# Altium PCB Copy of main - shifted.PcbDoc (part 11 of 15)
Units mil, origin at the board's own origin, x right, y up, seen from the top; angles counter-clockwise.
Board outline 8394.55 x 5164.44 mil, 7 copper layers (Top Layer 1, Layer 2, Layer 3, Unused, Layer 4_pow, Layer 5_gnd, Bottom 6+gnd), stack 46.112 mil thick; 363 components, 409 nets, 1750 pads, 991 vias.
Unrouted connection lines stored in the file: 111.
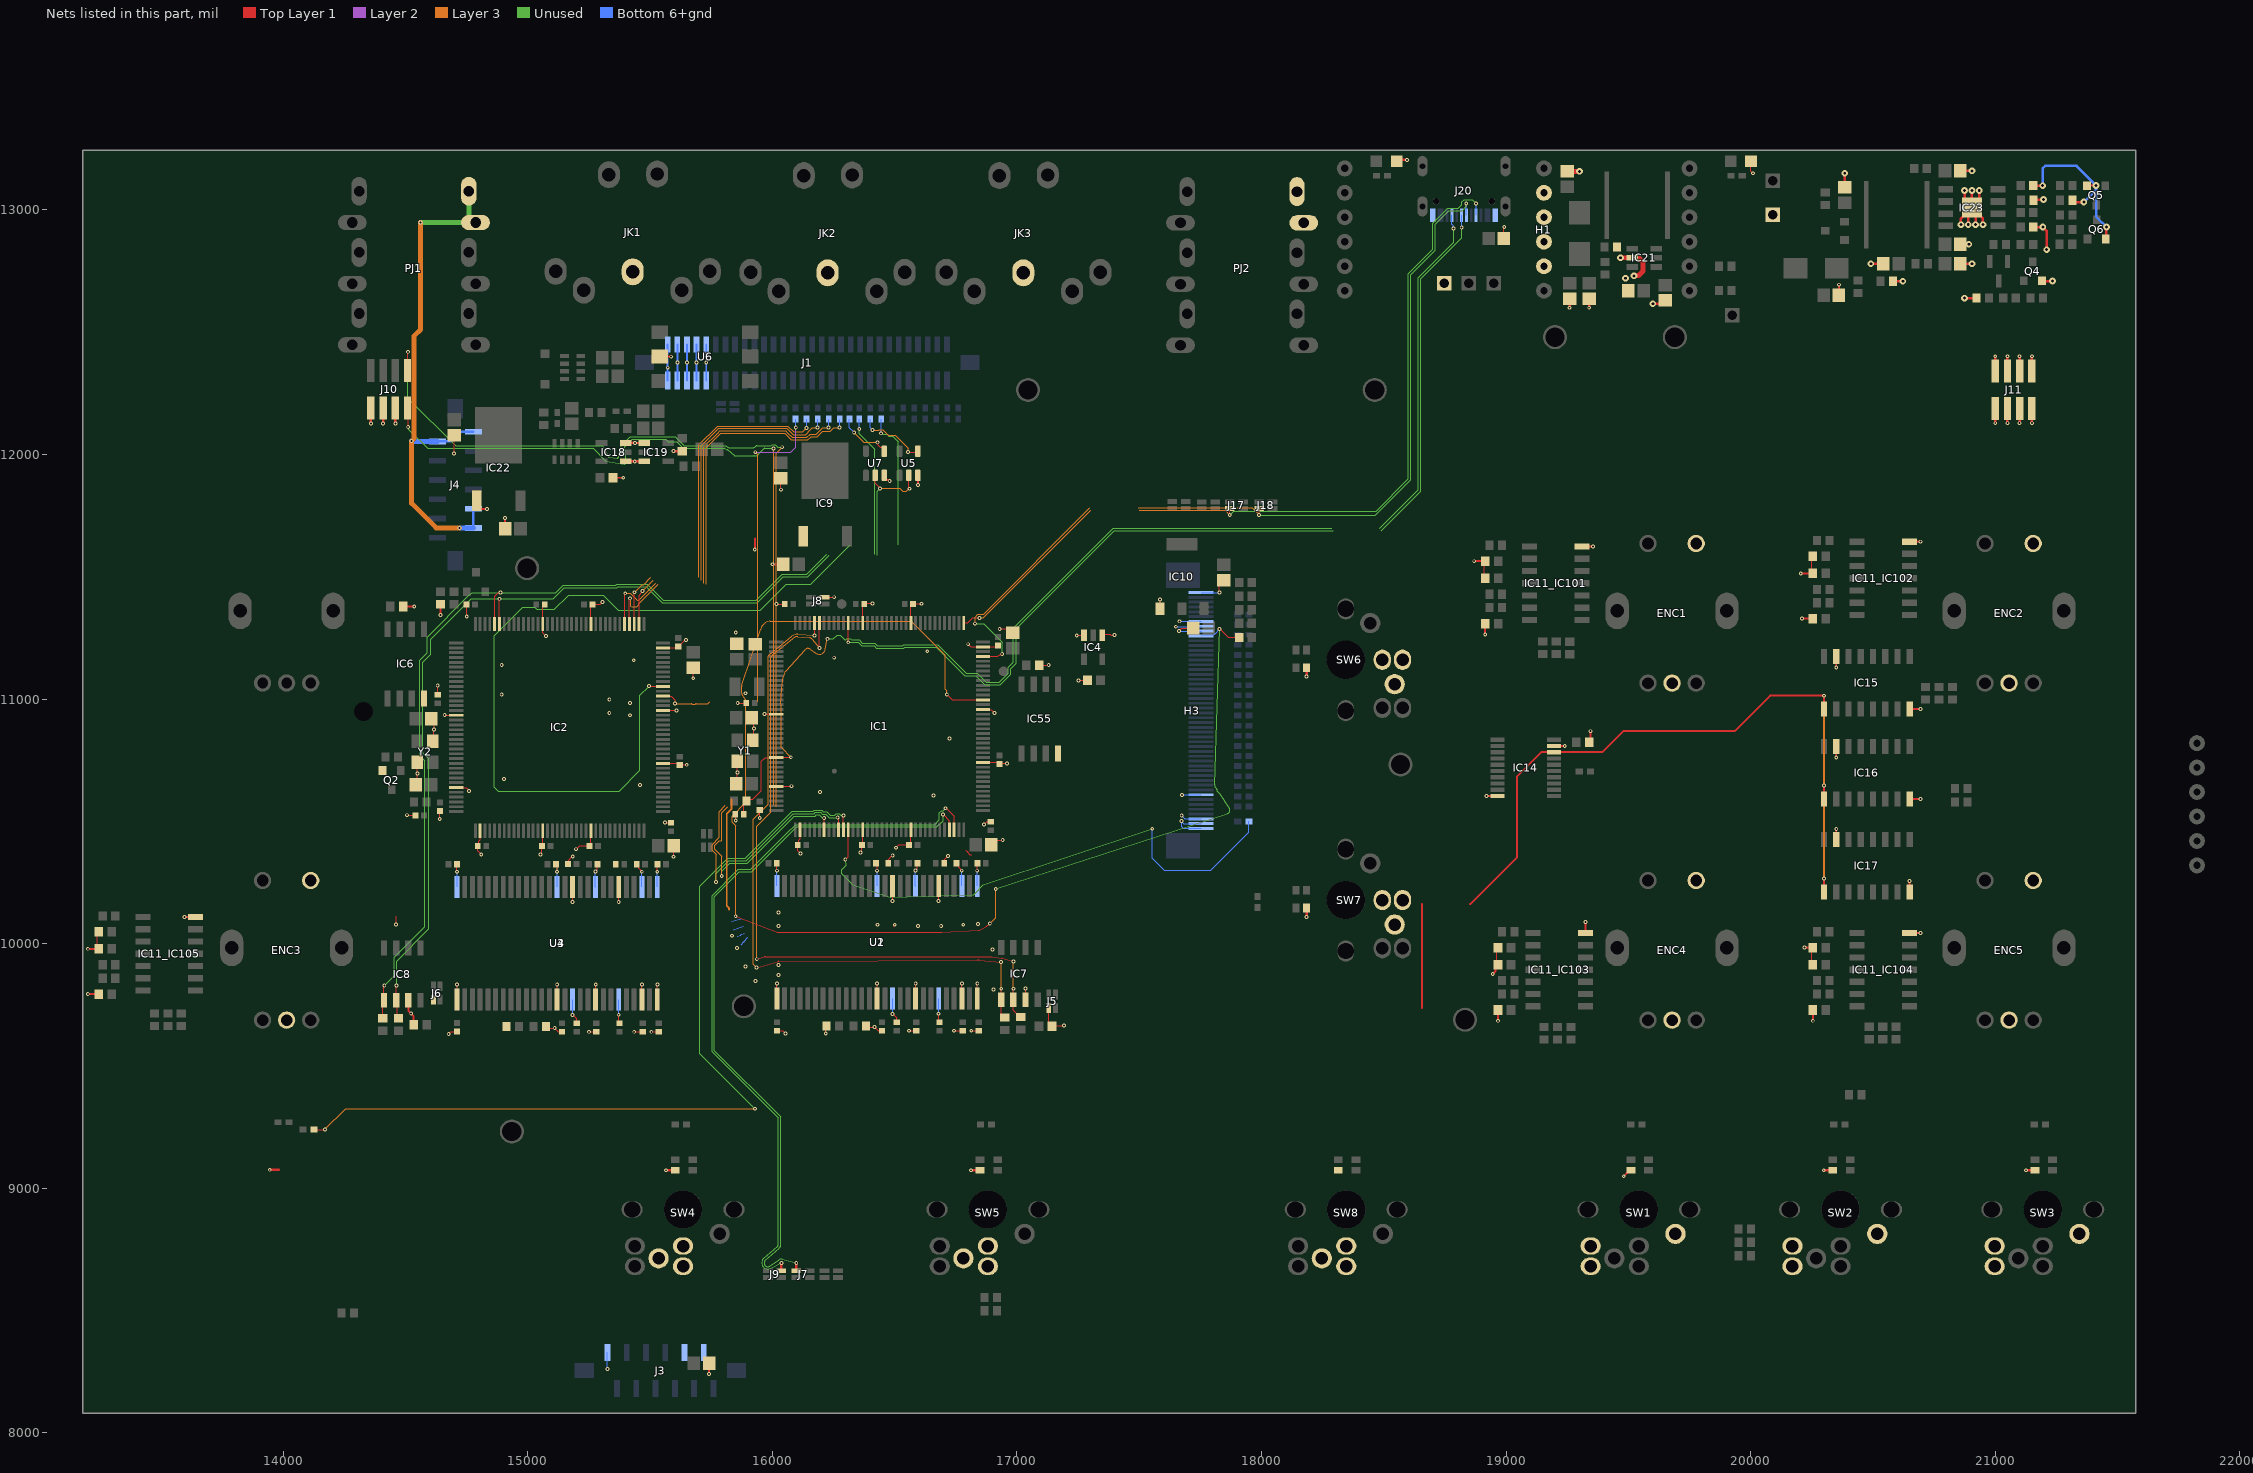
[diagram p14: the nets of this part, all layers, seen from the top]

## Via types
v1: diameter 15.75, hole 7.87, Top Layer 1 to Bottom 6+gnd, tented both sides, 923 vias
v2: diameter 27.56, hole 11.81, Top Layer 1 to Bottom 6+gnd, 45 vias
v3: diameter 23.62/23.62/23.62/23.62/23.62/23.62/23.62 (per signal layer), hole 12, Top Layer 1 to Bottom 6+gnd, tented top, 10 vias
v4: diameter 15.75, hole 7.87, Top Layer 1 to Bottom 6+gnd, 10 vias
v5: diameter 23.62/23.62/23.62/23.62/23.62/23.62/23.62 (per signal layer), hole 12, Top Layer 1 to Bottom 6+gnd, tented bottom, 3 vias

## Nets (pads, with @x,y where several pads share a name; then routed paths per layer and width w, separated by ;. In a path a pad name is that pad's centre, name@x,y a point inside that pad or via, vN(x,y) a via of type N, cw(c..) or ccw(c..) an arc to the next point about the centre after c; other vN are vias at no path point) (continued)
GND: C1.2 C2.2 C3.1 C4.1 C5.1 C6.1 C7.1 C8.1 C9.1 C10.1 C11.2 C12.2 C13.2 C14.2 C15.2 C16.2 C17.2 C18.2 C19.2 C20.2 C21.2 C22.2 C23.2 C24.2 C25.2 C26.2 C27.2 C28.2 C29.2 C30.2 C31.2 C32.2 C33.2 C34.2 C35.2 C36.2 C37.2 C38.2 C39.2 C40.2 C41.2 C42.2 C43.2 C44.2 C45.2 C46.2 C47.2 C48.2 C49.2 C50.2 C51.2 C52.2 C53.2 C54.2 C55.2 C56.2 C57.2 C58.2 C59.2 C60.2 C61.2 C63.1 C64.1 C65.1 C67.1 C68.1 C69.1 C70.1 C71.1 C72.1 C73.1 C74.1 C75.1 C76.1 C77_IC101.2 C77_IC102.2 C77_IC103.2 C77_IC104.2 C77_IC105.2 C78_IC101.2 C78_IC102.2 C78_IC103.2 C78_IC104.2 C78_IC105.2 C79_IC101.2 C79_IC102.2 C79_IC103.2 C79_IC104.2 C79_IC105.2 C80.2 C81.2 C85.1 C86.1 C87.1 C88.1 C89.1 C90.1 C91.1 C92.1 C93.1 C94.1 C95.1 C96.1 C97.1 D4.2 D5.2 ENC1.2 ENC1.C ENC2.2 ENC2.C ENC3.2 ENC3.C ENC4.2 ENC4.C ENC5.2 ENC5.C H1.2 H1.3 H1.4 H1.5 H3.1 H3.2 H3.3 H3.8 H3.42 H3.43 H3.44 H3.50 IC1.16 IC1.31 IC1.38 IC1.51 IC1.61 IC1.83 IC1.94 IC1.107 IC1.120 IC1.130 IC2.16 IC2.31 IC2.38 IC2.51 IC2.61 IC2.83 IC2.94 IC2.107 IC2.120 IC2.130 IC4.1 IC4.3 IC6.4 IC7.7 IC8.7 IC9.1 IC10.1 IC11_IC101.7 IC11_IC102.7 IC11_IC103.7 IC11_IC104.7 IC11_IC105.7 IC14.10 IC14.19 IC15.8 IC15.15 IC16.8 IC16.15 IC17.8 IC17.15 IC18.1 IC18.3 IC19.1 IC19.3 IC21.2 IC22.1 IC23.9 IC55.4 J1.51 J1.52 J1.53 J1.54 J1.55 J1.56 J1.57 J1.58 J1.59 J1.60 J3.1 J3.9 J3.11 J5.3 J6.3 J8.2 J10.4 J10.6 J10.8 J11.1 J11.2 J11.3 J11.4 J11.5 J11.6 J11.7 J11.8 J20.A1B12 J20.B1A12 JK1.2 JK2.2 JK3.2 PJ2.2 PJ2.22 Q2.2 Q4.2 Q5.2 Q6.2 R7.1 R9.1 R10.1 R12.1 R19.1 R20.1 R51.1 R109.2 R126.2 R127.2 R128.1 R129.1 SW1.2 SW1.S1 SW2.2 SW2.S1 SW3.2 SW3.S1 SW4.2 SW4.S2 SW5.2 SW5.S2 SW6.2 SW6.S2 SW7.2 SW7.S2 SW8.2 SW8.S2 TP14.1 TP16.1 U1.6 U1.12 U1.28 U1.41 U1.46 U1.52 U1.54 U2.6 U2.12 U2.28 U2.41 U2.46 U2.52 U2.54 U3.6 U3.12 U3.28 U3.41 U3.46 U3.52 U3.54 U4.6 U4.12 U4.28 U4.41 U4.46 U4.52 U4.54 U5.3 U6.5 U7.3 Y1.2 Y1.4 Y2.2 Y2.4 | length 14393
  Top Layer 1 w5: C77_IC105.2@13240.16,9978.82 C79_IC105.2@13240.16,10048.82 ; v1(14461.48,10078.26) 14461.48,10111.48 ; v1(14506.48,10525.26) 14539.63,10525.26 C8.1@14540.26,10524.63 ; C6.1@14548.41,10649.63 v1(14548.41,10695.47) Y2.2@14548.41,10741.32 ; Y2.4@14611.41,10827.94 14616.41,10832.94 14616.11,10833.23 v1(14616.11,10876.28) ; v1@14616.41,10876.28 C4.1@14616.41,10919.63 ; C23.2@14631.48,11017.58 v1(14631.48,11055.26) ; v1(14639.91,10509.97) C22.2@14639.91,10542.14 ; v1(14659.99,10934.67) 14660.41,10934.26 14706.74,10934.26 IC2.16@14707.15,10933.84 ; v1(14676.48,9631.26) 14685.21,9639.98 C47.2@14709.85,9639.98 ; v1(14698.37,12004.72) 14698.37,12076.56 C87.1@14700,12078.19 ; U3.28@14702.9,9789.27 U3.28@14710.4,9781.77 ; IC2.31@14707.15,10638.57 14707.31,10638.41 14748.42,10638.41 14760.1,10626.73 v1(14760.1,10624.81) ; C60.2@14709.85,10324.63 14710.16,10324.32 v1(14710.16,10294.12) ; v1@14710.4,9833.24 U3.28@14710.4,9781.77 ; C24.2@14749.75,11386.87 14750.16,11386.47 v1(14750.16,11338.03) ; IC2.38@14805.11,10461.87 14805.11,10424.83 14799.91,10419.63 14799.91,10404.27 C29.2@14795.26,10399.63 14795.26,10379.48 v1(14809.48,10365.26) ; R12.1@14911.34,9658.48 R12.1@14912.49,9659.63 ; v1@15052,10367.54 15057.59,10373.13 C30.2@15057.59,10396.24 ; C30.2@15057.59,10399.63 15061.01,10403.05 IC2.51@15061.01,10461.87 ; C25.2@15069.04,11386.87 15061.01,11378.84 IC2.130@15061.01,11307.38 15061.01,11271.73 v1(15074.48,11258.26) ; R9.1@15074.85,9659.63 15079.85,9654.63 v1(15109.85,9654.63) 15124.5,9639.98 C48.2@15139.85,9639.98 ; C59.2@15114.85,10324.63 15119.6,10319.87 v1(15119.6,10294.12) ; U3.41@15119.85,9771.4 v1@15119.85,9833.24 ; C58.2@15165.2,10324.63 15165.2,10339.73 15182.49,10357.01 v1(15183.58,10357.01) ; v1@15182.84,10170.19 U3.12@15182.84,10232.03 ; v1(15183.24,9708.66) 15199.85,9692.06 C49.2@15199.85,9674.63 ; v1(15196.48,10386.26) 15198.48,10386.26 15211.85,10399.63 C31.2@15252.59,10399.63 15257.86,10404.9 IC2.61@15257.86,10461.87 ; v1(15249.85,9639.63) 15279.5,9639.63 C50.2@15279.85,9639.98 ; IC2.120@15257.86,11307.38 15257.86,11380.69 C26.2@15264.04,11386.87 15295.1,11386.87 v1(15305.48,11397.26) ; v1(15276.67,10294.63) 15284.85,10302.81 C57.2@15284.85,10324.63 ; U3.46@15277.33,9771.4 v1@15277.33,9833.24 ; v1(15371.57,9709.31) 15371.57,9677.9 C51.2@15374.85,9674.63 ; v1@15371.82,10170.19 U3.6@15371.82,10232.03 ; v1(15434.85,9639.63) 15469.5,9639.63 C52.2@15469.85,9639.98 ; C55.2@15444.85,10324.63 15452.71,10316.77 15452.71,10307.47 v1(15466.06,10294.12) ; U3.52@15466.31,9771.4 v1@15466.31,9833.24 ; v1(15504.85,9639.63) 15534.89,9639.63 C53.2@15535.24,9639.98 ; v1(15529.05,10294.12) 15529.05,10323.83 C54.2@15529.85,10324.63 ; U3.54@15529.3,9771.4 U3.54@15529.3,9771.46 v1@15529.3,9833.24 ; IC2.83@15552.67,10736.99 C32.2@15612.9,10736.99 ; IC2.94@15552.67,10953.53 15552.8,10953.39 15607.35,10953.39 v1(15607.48,10953.26) ; IC2.107@15552.67,11209.43 15609.71,11209.43 C27.2@15614.91,11214.63 15615.7,11214.63 15642.33,11241.26 15645.48,11241.26 v1(15646.48,11242.26) ; v1(15560.28,10494.98) C28.2@15584.55,10494.98 ; v1(15595.66,10355.38) C10.1@15595.66,10398.88 ; C32.2@15620.89,10730.01 15622.25,10731.37 v1(15649.84,10731.37) ; v1(15676.48,11085.26) C2.2@15676.48,11128.76 ; C7.1@15848.5,10528.82 15850.83,10526.5 15850.2,10525.86 v1(15850.2,10504.19) ; C5.1@15856.65,10653.82 v1(15856.65,10699.66) Y1.2@15856.65,10745.51 ; v1(15858.15,10983.82) C12.2@15893.5,10983.82 ; Y1.4@15919.65,10832.13 15924.65,10837.13 v1(15924.65,10880.47) C3.1@15924.65,10923.82 ; v1@15925.24,9847.2 v1(15930.24,9847.2) ; v1(15948.37,10513.6) 15948.37,10546.55 C13.2@15948.6,10546.77 ; v1(15968.15,10938.82) 15968.94,10938.03 IC1.16@16015.39,10938.03 ; U1.28@16011.2,9793.46 U1.28@16018.7,9785.96 ; IC1.31@16015.39,10642.76 16015.93,10643.29 16078.26,10643.29 v1(16078.79,10643.82) ; v1(16017.02,11388.21) 16017.63,11388.82 C11.2@16050.83,11388.82 ; C33.2@16018.15,9644.17 16018.5,9643.82 16041.76,9643.82 v1(16053.02,9632.56) ; C40.2@16018.15,10328.82 16018.46,10328.51 v1(16018.46,10298.31) ; v1@16018.7,9837.43 U1.28@16018.7,9785.96 ; v1(16035,11856.18) C71.1@16035,11903.19 ; IC1.38@16113.35,10466.06 16113.35,10429.01 16108.15,10423.82 16108.15,10408.46 C21.2@16103.5,10403.82 16103.5,10378.94 v1(16114.37,10368.07) ; J8.2@16213.15,11416.38 16252.5,11416.38 v1(16252.73,11416.61) ; v1@16218.15,9628.82 v1(16218.15,9632.56) 16218.15,9661.18 R10.1@16220.79,9663.82 ; v1(16360.24,10372.2) 16360.24,10375.11 16365.83,10380.7 C20.2@16365.83,10403.82 16369.25,10407.24 IC1.51@16369.25,10466.06 ; IC1.130@16369.25,11311.57 16369.25,11395.27 C14.2@16372.8,11398.82 ; C14.2@16375.47,11388.82 16378.76,11392.1 16408.4,11392.1 v1(16409.27,11391.23) ; R7.1@16383.15,9663.82 16388.15,9658.82 v1(16418.15,9658.82) 16432.8,9644.17 C34.2@16448.15,9644.17 ; C41.2@16423.15,10328.82 16427.9,10324.06 v1(16427.9,10298.31) ; U1.41@16428.15,9775.59 v1@16428.15,9837.43 ; C46.2@16473.5,10328.82 16473.5,10343.92 16490.79,10361.2 v1(16491.88,10361.2) ; v1@16491.14,10174.38 U1.12@16491.14,10236.22 ; v1(16491.54,9712.85) 16508.15,9696.25 C35.2@16508.15,9678.82 ; v1@16495.24,10072.2 v1(16500.24,10077.2) ; v1(16505.24,10392.2) 16516.85,10403.82 C19.2@16558.4,10403.82 ; v1(16558.15,9643.82) 16587.8,9643.82 C36.2@16588.15,9644.17 ; C19.2@16560.83,10403.82 16566.1,10409.09 IC1.61@16566.1,10466.06 ; IC1.120@16566.1,11311.57 16566.1,11392.13 C15.2@16572.8,11398.82 ; C15.2@16575.47,11388.82 16576.57,11389.92 v1(16610.29,11389.92) ; v1(16584.97,10298.82) 16593.15,10307 C42.2@16593.15,10328.82 ; U1.46@16585.63,9775.59 v1@16585.63,9837.43 ; v1(16679.87,9713.5) 16679.87,9682.09 C37.2@16683.15,9678.82 ; v1(16679.87,10174.13) U1.6@16679.87,10235.97 ; v1@16680.12,10174.38 U1.6@16680.12,10236.22 ; v1@16680.36,10174.62 U1.6@16680.36,10236.46 ; v1@16680.61,10174.38 U1.6@16680.61,10271.22 ; C43.2@16702.8,10328.82 16702.8,10343.46 v1(16718.15,10358.82) ; v1(16743.15,9643.82) 16777.8,9643.82 C38.2@16778.15,9644.17 ; C44.2@16753.15,10328.82 16761.01,10320.96 16761.01,10311.66 v1(16774.36,10298.31) ; U1.52@16774.36,9775.4 v1@16774.36,9837.68 ; U1.52@16774.61,9775.59 v1@16774.61,9837.43 ; U1.52@16774.85,9775.83 v1(16774.85,9837.68) ; U1.52@16775.1,9740.59 v1@16775.1,9837.43 ; 16791.24,10382.2 16798.56,10374.88 16798.56,10373.15 16807.51,10364.2 16814.24,10364.2 ; v1(16800.53,11224.53) 16801.67,11224.53 16811.97,11214.22 16860.31,11214.22 IC1.107@16860.91,11213.62 16917.95,11213.62 C16.2@16923.15,11218.82 ; v1(16813.15,9643.82) 16843.19,9643.82 C39.2@16843.54,9644.17 ; v1(16837.35,10298.31) 16837.35,10328.02 C45.2@16838.15,10328.82 ; U1.54@16837.6,9775.59 v1@16837.6,9837.43 ; IC1.83@16860.91,10741.18 16921.14,10741.18 C17.2@16928.15,10734.17 16930.75,10736.78 v1(16959.55,10736.78) 16959.98,10737.2 v1@16960.24,10737.2 ; IC1.94@16860.91,10957.72 16862.24,10956.38 16894.51,10956.38 v1@16907.52,10943.37 ; v1(16864.86,10487.58) 16876.09,10498.82 16892.8,10498.82 C18.2@16893.15,10498.46 ; C9.1@16894.65,10403.82 16914.59,10423.76 v1(16941.67,10423.76) ; v1(16929.46,11287.1) 16966.36,11287.1 C1.2@16983.15,11270.31 C1.2@16991.3,11262.16 ; IC7.7@17035.24,9770.43 v1(17035.24,9817.2) ; C63.1@17083.1,11138.84 v1(17129.81,11138.84) ; J5.3@17130.24,9737.09 17130.24,9680.2 17148.23,9662.2 17151.23,9665.2 v1(17192.24,9665.2) ; v1(17244.36,11260.34) 17244.96,11260.94 IC4.3@17274.13,11260.94 ; v1(17251.31,11076.73) C61.2@17283.54,11076.73 ; IC4.1@17348.94,11260.94 17352.38,11264.39 17381.29,11264.39 17383.79,11261.89 17398.79,11261.89 v1(17399.16,11261.52) ; IC10.1@17585.26,11360.08 v1(17585.26,11407.09) ; v1(17662.65,11277.91) 17674.31,11289.57 17703.46,11289.57 C76.1@17716.5,11302.6 ; v1(17827.95,11436.25) 17827.95,11469.09 C74.1@17844.57,11485.71 ; C77_IC101.2@18909.72,11493.82 C79_IC101.2@18909.72,11563.82 ; C77_IC103.2@18962.01,9913.82 C79_IC103.2@18962.01,9983.82 ; C88.1@18991.1,12883.31 18990.73,12883.68 18990.73,12928.69 v1(18992.61,12930.57) ; D4.2@20001.34,13200 20001.34,13158.66 v1(20010,13150) ; C77_IC104.2@20249.29,9913.82 C79_IC104.2@20249.29,9983.82 ; C77_IC102.2@20249.29,11513.82 C79_IC102.2@20249.29,11583.82 ; U3.28@14710.4,9781.77 U3.28@14710.4,9771.46 14710.4,9771.4 U3.28@14710.4,9781.77 ; U1.28@16018.7,9785.96 U1.28@16018.7,9775.59 U1.28@16018.7,9785.96
  Top Layer 1 w8: v1@13200.91,9793.82 C78_IC105.2@13245.08,9793.82 ; v1@13200.91,9978.82 C77_IC105.2@13245.08,9978.82 ; v1@13596.26,10108.82 IC11_IC105.7@13640.43,10108.82 ; C86.1@14491.22,11378.82 v1@14535.39,11378.82 ; IC8.7@14511.48,9768.49 14511.48,9725.48 v1(14523.15,9713.82) 14533.15,9703.82 C64.1@14533.15,9668.82 ; v1@14643.15,11343.47 R109.2@14643.15,11387.64 ; IC22.1@14790,11794.64 14790,11793.43 14806.16,11777.27 14832.36,11777.27 v1(14832.51,11777.42) ; C75.1@14907.01,11696.18 v1@14907.01,11740.35 ; C80.2@15348.15,11905 v1(15390,11905) ; U6.5@15539.96,12400 v1(15586.22,12400) ; v1@15741.5,8240.83 C85.1@15741.5,8285 ; v1@15928.15,11612.01 15928.15,11656.18 ; v1@16000.99,11551.18 C72.1@16045.16,11551.18 ; U7.3@16457.4,11915 16457.4,11903.77 16464.88,11896.3 16473.63,11896.3 16477.53,11892.4 v1(16479.63,11892.4) v1@16480,11892.03 ; v1(16594.8,11875.2) U5.3@16594.8,11915 ; v1(18869.65,11563.82) C79_IC101.2@18914.65,11563.82 ; v1(18914.65,11263.82) C78_IC101.2@18914.65,11308.82 ; v1(18920,10603.82) 18920.16,10603.66 IC14.10@18964.33,10603.66 ; v1(18945.5,9875.67) 18956.65,9886.82 18956.65,9903.54 C77_IC103.2@18966.93,9913.82 ; v1@18966.93,9684.65 C78_IC103.2@18966.93,9728.82 ; IC14.19@19195.67,10808.38 19195.89,10808.6 19239.78,10808.6 v1(19240,10808.82) ; IC11_IC101.7@19310,11623.82 v1(19355,11623.82) ; IC11_IC103.7@19325,10043.82 v1@19325,10087.99 ; C73.1@19345,10823.82 v1(19345,10868.82) ; v1@20205.12,11513.82 C77_IC102.2@20249.29,11513.82 ; v1@20210.04,11328.82 C78_IC102.2@20254.21,11328.82 ; v1@20220.83,9983.82 C79_IC104.2@20265,9983.82 ; v1@20254.21,9684.65 C78_IC104.2@20254.21,9728.82 ; IC17.15@20350,10423.82 v1@20350,10467.99 ; v1@20350,10761.93 IC16.15@20350,10806.1 ; v1@20350,11129.65 IC15.15@20350,11173.82 ; IC11_IC104.7@20649.57,10043.82 v1@20693.74,10043.82 ; IC11_IC102.7@20649.57,11643.82 v1@20693.74,11643.82 ; IC17.8@20650,10211.53 v1@20650,10255.71 ; IC16.8@20650,10591.53 v1@20694.17,10591.53 ; IC15.8@20650,10959.25 v1@20694.17,10959.25
  Top Layer 1 w10: v1(13944.81,9075.38) 13981.69,9075.38 ; v1(14358.32,12126.42) J10.8@14358.32,12190.6 ; v1(14408.32,12126.42) J10.6@14408.32,12190.6 ; v1(14458.32,12126.42) J10.4@14458.32,12190.6 ; IC18.1@15399.63,11972.31 15400.27,11971.67 v1(15437.29,11971.67) 15437.93,11972.31 IC19.3@15476.2,11972.31 ; IC18.3@15399.63,12047.11 15399.84,12047.32 v1(15438.73,12047.32) 15438.93,12047.11 IC19.1@15476.2,12047.11 ; v1(15565.57,9073.5) SW4.2@15602.44,9073.5 ; v1(15595.04,12014.29) 15595.17,12014.16 C81.2@15641.2,12014.16 ; v1(16812.25,9073.5) SW5.2@16849.12,9073.5 ; v1(18184.11,10109.26) SW7.2@18184.11,10146.13 ; v1(18184.11,11091.85) SW6.2@18184.11,11128.72 ; D5.2@18552.68,13200 18557.68,13205 v1(18595,13205) ; v1(19259.81,12600.13) C89.1@19259.81,12637 ; v1(19339.81,12600.13) C91.1@19339.81,12637 ; v1(19481.11,9048.93) SW1.2@19507.18,9075 ; v2(19600.08,12616.31) 19600.88,12617.12 19637.12,12617.12 C69.1@19650,12630 ; v1(20298.76,9073.5) SW2.2@20335.64,9073.5 ; C92.1@20361.14,12650 C92.1@20361.49,12649.65 ; C92.1@20361.14,12650.98 v1(20361.14,12694.49) ; C97.1@20384.65,13092.99 v2(20384.65,13150) ; v2(20491.54,12780) C95.1@20541.65,12780 ; R19.1@20580.83,12710 R19.1@20582.1,12708.73 v2(20622.34,12708.73) ; C94.1@20857.64,12780 v2(20904.65,12780) ; C93.1@20857.64,12860 v2(20892.09,12860) ; C96.1@20857.64,13160 v2(20904.65,13160) ; v2(20859.65,12940) 20859.65,12965 IC23.9@20889.65,12995 ; v2(20874.02,12639.37) R51.1@20922.83,12639.37 ; v2(20874.65,13080) 20874.65,13040 IC23.9@20904.65,13010 ; v2(20889.65,12940) IC23.9@20889.65,12995 ; v2(20904.65,13080) IC23.9@20904.65,13010 ; v2(20919.65,12940) 20919.65,12980 20927.15,12987.5 20949.65,12965 v2(20949.65,12940) ; v2(20934.65,13080) 20934.65,13040 IC23.9@20904.65,13010 ; v1(21000,12128.13) J11.8@21000,12165 ; J11.7@21000,12365 v1(21000,12401.87) ; v1(21050,12128.13) J11.6@21050,12165 ; J11.5@21050,12365 v1(21050,12401.87) ; v1(21100,12128.13) J11.4@21100,12165 ; J11.3@21100,12365 v1(21100,12401.87) ; v1(21125.53,9073.5) SW3.2@21162.41,9073.5 ; v1(21150,12128.13) J11.2@21150,12165 ; J11.1@21150,12365 v1(21150,12401.87) ; R126.2@21155.83,12930 v2(21194.65,12930) 21210.21,12914.44 v2(21210.21,12837.57) ; R128.1@21155.83,13100 21156.51,13099.31 v2(21194.06,13099.31) ; R127.2@21158.72,13042.5 v2(21197.54,13042.5) ; Q4.2@21191.42,12710 21192.05,12709.37 v2(21234.02,12709.37) ; R129.1@21315.83,13040 21323.64,13032.19 v2(21362.46,13032.19) ; Q5.2@21377.24,13098.74 21378.5,13100 v2(21412.52,13100) ; Q6.2@21452.05,12881.26 21454.65,12883.86 v2(21454.65,12930) ; IC23.9@20889.65,12995 IC23.9@20904.65,13010
  Top Layer 1 w20: C70.1@19249.81,13157.99 v2(19299.81,13157.99) ; v2(19467.8,12804.4) 19543.5,12804.4 19560.01,12787.89 19560.01,12749.74 19542.4,12732.13 19524.79,12732.13 v2(19523.34,12730.68)
  Layer 3 w8: 15823.15,10138.82 15823.15,10145.75 15813.32,10155.58 15813.32,10530.7 15833.7,10551.08 15833.7,10588.82
  Bottom 6+gnd w5: U4.28@14710.4,10232.03 v1@14710.4,10293.87 ; v1(15119.6,10294.12) 15119.6,10308.38 15121.48,10310.26 ; U4.41@15119.85,10232.03 v1@15119.85,10293.87 ; U4.12@15182.84,9771.4 15183.24,9771 v1(15183.24,9708.66) ; v1(15276.67,10294.63) 15276.67,10232.69 U4.46@15277.33,10232.03 ; v1(15325.53,8260.95) 15325.53,8276.49 15325.65,8276.61 J3.1@15325.65,8328.46 ; v1@15371.82,9709.56 U4.6@15371.82,9771.4 ; U4.52@15466.31,10232.03 U4.52@15466.31,10232.09 v1@15466.31,10293.87 ; U4.54@15529.3,10232.03 U4.54@15529.3,10232.09 v1@15529.3,10293.87 ; 15834.57,10091.84 15872.27,10101.06 ; 15840.24,10057.2 15880.24,10072.2 ; 15855.63,10029.28 15870.69,10035.41 ccw(c15864.89,10049.65) 15871.42,10035.73 15885.24,10042.2 ; 15872.87,9996.4 15883.49,10007.41 cw(c15894.55,9996.73) 15883.68,10007.61 15884.26,10008.18 ; 15900.24,10027.2 15885.19,10009.19 ; U2.28@16018.7,10236.22 v1@16018.7,10298.06 ; U2.41@16428.15,10236.22 v1@16428.15,10298.06 ; U2.12@16491.14,9775.59 16491.54,9775.19 v1(16491.54,9712.85) ; v1(16584.97,10298.82) 16584.97,10236.88 U2.46@16585.63,10236.22 ; v1@16680.12,9713.75 U2.6@16680.12,9775.59 ; U2.52@16774.61,10236.22 v1@16774.61,10298.06 ; U2.54@16837.6,10236.22 v1@16837.6,10298.06 ; v1(17649.57,11295.71) 17650.63,11296.77 17752.09,11296.77 H3.43@17753.15,11297.83 ; v1@17662.41,11277.67 17662.89,11278.15 H3.42@17753.15,11278.15 ; v1(17664.27,11318.02) 17664.52,11317.77 17752.9,11317.77 H3.44@17753.15,11317.52 ; v1(17672.07,10501.81) 17672.07,10499.9 v1@17673.15,10498.82 ; v1(17673.52,10523.98) 17687.06,10510.43 H3.3@17753.15,10510.43 H3.3@17753.93,10511.21 ; v1(17675.26,10608.09) 17675.65,10608.47 17752.77,10608.47 H3.8@17753.15,10608.86 ; H3.1@17753.15,10471.06 17680.9,10471.06 17673.15,10478.82 v1@17673.15,10498.82 ; H3.50@17753.15,11435.63 v1@17827.33,11435.63 ; H3.2@17753.77,10491.37 H3.2@17753.15,10490.75 17681.22,10490.75 v1@17673.15,10498.82 ; 15884.26,10008.18 ccw(c15873.39,10019.05) 15885.19,10009.19 ; 15884.26,10008.18 ccw(c15873.39,10019.05) 15885.19,10009.19 ; 15884.26,10008.18 ccw(c15873.39,10019.05) 15885.19,10009.19 ; 15884.26,10008.18 ccw(c15873.39,10019.05) 15885.19,10009.19 ; 15884.26,10008.18 ccw(c15873.39,10019.05) 15885.19,10009.19 ; 15884.26,10008.18 ccw(c15873.39,10019.05) 15885.19,10009.19 ; 15884.26,10008.18 ccw(c15873.39,10019.05) 15885.19,10009.19 ; 15884.26,10008.18 ccw(c15873.39,10019.05) 15885.19,10009.19 ; 15884.26,10008.18 ccw(c15873.39,10019.05) 15885.19,10009.19 ; 15884.26,10008.18 ccw(c15873.39,10019.05) 15885.19,10009.19 ; 15884.26,10008.18 ccw(c15873.39,10019.05) 15885.19,10009.19 ; 15884.26,10008.18 ccw(c15873.39,10019.05) 15885.19,10009.19 ; 15884.26,10008.18 ccw(c15873.39,10019.05) 15885.19,10009.19 ; 15884.26,10008.18 ccw(c15873.39,10019.05) 15885.19,10009.19 ; 15884.26,10008.18 ccw(c15873.39,10019.05) 15885.19,10009.19 ; 15884.26,10008.18 ccw(c15873.39,10019.05) 15885.19,10009.19
  Bottom 6+gnd w8: J1.59@15571.97,12302.36 v1(15571.97,12355) 15571.97,12390.39 15569.35,12393.01 15569.35,12406.99 15571.97,12409.61 J1.60@15571.97,12450 ; J1.57@15611.34,12302.36 v1(15611.34,12376.18) J1.58@15611.34,12450 ; J1.55@15650.71,12302.36 v1(15650.71,12376.18) J1.56@15650.71,12450 ; J1.53@15690.08,12302.36 v1(15690.08,12376.18) J1.54@15690.08,12450 ; J1.51@15729.45,12302.36 v1(15729.45,12376.18) J1.52@15729.45,12450
  Bottom 6+gnd w10: v2(21194.06,13099.31) 21194.06,13169.42 21204.65,13180 21332.52,13180 v2(21412.52,13100) ; v2(21362.46,13032.19) 21411.49,13081.22 21411.49,13098.97 v2(21412.52,13100) ; v2(21454.65,12930) 21412.52,12972.13 v2(21412.52,13100)
  other v1: 15741.34,8240.67 18966.77,9684.49 20254.06,9684.49 13200.75,9793.98 16903.52,9812.2 14710.65,9833.49 15120.09,9833.49 15277.57,9833.49 15466.55,9833.49 15529.54,9833.49 16018.95,9837.68 16428.39,9837.68 16585.87,9837.68 16837.84,9837.68 16025.24,9872.2 15890.24,9907.2 16025.24,9912.2 16899.82,9976.53 13200.75,9978.98 15855.24,9982.2 20220.67,9983.98 15835.24,10032.2 20693.9,10043.66 16025.24,10072.2 16595.24,10072.2 16690.24,10072.2 16430.24,10077.2 16780.24,10077.2 16841.16,10080.26 19325.16,10088.15 13596.1,10108.98 16025.24,10127.2 15182.6,10169.94 15371.57,10169.94 16490.9,10174.13 20650.16,10255.86 15052,10364.63 20350.16,10468.15 20694.33,10591.38 16658.99,10605.43 16194.46,10620.38 15458.15,10648.82 14903.15,10673.82 20349.84,10761.77 16724.81,10838.82 15418.15,10933.82 16907.52,10943.24 15333.15,10943.82 20694.33,10959.09 15418.15,10983.82 15333.15,10998.82 14893.15,11018.82 15889.86,11023.77 20349.84,11129.49 14893.15,11138.82 15433.15,11158.82 16252.71,11169.26 16633.15,11195.74 15850.24,11272.2 20209.88,11328.98 14642.99,11343.31 14535.55,11378.66 20204.96,11513.98 16000.83,11551.34 15927.99,11611.85 20693.9,11643.66 14907.17,11740.51
  other v2: 19488.62,12720.72
GND_A: J4.2 J4.4 J4.11 J4.12 PJ1.2 PJ1.22 | length 2139.1
  Unused w20: v1(14561.41,12948.59) PJ1.22@14786.24,12948.59 ; PJ1.22@14758.68,12968.45 PJ1.2@14758.68,13076.5
  Layer 3 w20: v1(14561.41,12948.59) 14561.41,12511.41 14535,12485 14535,12065 v1(14525,12055) 14525,11800 14625,11700 v1(14720,11700)
  Bottom 6+gnd w10: J4.11@14630,12053.7 14688.7,12053.7 14728.07,12093.07 J4.12@14777.64,12093.07 ; J4.2@14777.64,11699.37 J4.4@14777.64,11778.11
  Bottom 6+gnd w20: v1(14525,12055) 14526.3,12053.7 J4.11@14630,12053.7 ; v1(14720,11700) 14777.01,11700 J4.2@14777.64,11699.37
GPIO_GUI.LED1_1: IC1.43 J10.1 | length 4374.9
  Top Layer 1 w5: J10.1@14508.32,12344.14 14510,12345.82 v1(14510,12420) ; IC1.43@16211.77,10466.06 v1(16211.79,10513.73)
  Unused w5: v1(14510,12420) 14510,12230 14705,12035 15305,12035 15328.77,11992.22 ; 15328.78,11992.19 ccw(c15333.14,11994.65) 15332.5,11989.69 15365.55,11985.56 ; 15365.58,11985.55 ccw(c15366.17,11990.52) 15371.04,11989.36 15381.58,12033.62 15381.91,12035 15382.91,12036 15419.6,12072.69 15602.41,12072.69 15640.1,12035 15809.63,12035 15816.54,12030.72 cw(c15813.89,12026.48) 15817.05,12030.35 ccw(c15825,12040) 15825,12027.5 15920.28,12027.5 ccw(c15920.28,12040) 15929.14,12031.19 15931.51,12033.55 cw(c15935.03,12030) 15935.03,12035 15993.26,12035 15998.63,12040.37 16011.37,12040.37 16021.74,12030 v1(16040,12030) ; v1(15793.05,10275.98) 15793.05,10297.04 15825.01,10329 15897.02,10329 16088.96,10520.94 16174.45,10520.94 16179.83,10526.31 16192.57,10526.31 16203.09,10515.79 16209.74,10515.79 v1(16211.79,10513.73)
  Layer 3 w5: v1(15793.05,10275.98) 15793.05,10356.61 15763.84,10385.82 15763.84,10401.55 15782.29,10420 15790.22,10420 15793.15,10422.93 15793.15,10535.04 15818.15,10560.04 ; 16015,10560.04 16015,12005 v1(16040,12030)
GPIO_GUI.LED2_1: IC1.46 J10.2 | length 4258.9
  Top Layer 1 w5: J10.2@14508.32,12190.6 14510.75,12188.17 v1(14510.75,12112.06) ; v1(16266.92,10515.28) 16266.92,10514.31 16270.83,10510.4 IC1.46@16270.83,10466.06
  Unused w5: v1(14510.75,12112.06) 14512.72,12110.09 14512.72,12102.28 14590,12025 15267.74,12025 15317.75,11973.51 ccw(c15321.33,11977) 15320.56,11972.06 15393.75,11960.95 ; 15393.78,11960.94 ccw(c15394.5,11965.89) 15399.48,11966.3 15394.28,12029.66 15427.31,12062.69 15563.21,12062.69 15573.21,12052.69 15608.27,12052.69 15635.96,12025 15805.36,12025 ; v1(15769.97,10252.68) 15768.64,10254.02 15768.64,10286.77 15820.87,10339 15892.88,10339 16084.82,10530.94 16170.31,10530.94 16175.69,10536.31 16196.71,10536.31 16203.81,10529.21 16218.05,10529.21 16231.99,10515.28 v1(16266.92,10515.28) ; 15805.39,12025 cw(c15805.33,12020) 15808.06,12024.19 15812.71,12021.16 ccw(c15825,12040) 15815.47,12019.62 15815.98,12019.38 cw(c15813.87,12014.85) 15817.05,12018.71 ; 15817.09,12018.67 15843.6,11996.19 ; 15843.62,11996.17 ccw(c15846.83,12000) 15846.83,11995 15924.56,11995 cw(c15924.53,11990) 15925.85,11994.82 ccw(c15930,12009.63) 15941.87,11999.85 cw(c15945.7,11996.64) 15942.14,12000.15 15965.54,12023.55 cw(c15969.06,12020) 15969.06,12025 v1(16005,12025)
  Layer 3 w5: v1(15769.97,10252.68) 15769.97,10365.55 15753.84,10381.68 15753.84,10389.31 15753.15,10390 15753.15,10405 15783.15,10435 15783.15,10540 15808.15,10565 ; 16005,10565 v1(16005,12025)
GPIO_GUI.LED3_1: IC1.47 R3.2 | length 3630.3
  Top Layer 1 w5: R3.2@14125.79,9240 14169.92,9240 v1(14170.5,9240.58) ; IC1.47@16290.51,10466.06 16290.51,10523.36 v1(16291.15,10524)
  Unused w5: v1(15928.15,9325) 15703.15,9550 15703.15,10235.43 15816.72,10349 15888.74,10349 16080.68,10540.94 16166.17,10540.94 16171.54,10546.31 16200.85,10546.31 16207.95,10539.21 16222.19,10539.21 16236.13,10525.28 16255.18,10525.28 16260.56,10530.65 16273.29,10530.65 16279.68,10524.27 16290.88,10524.27 v1(16291.15,10524)
  Layer 3 w5: v1(14170.5,9240.58) 14255.5,9325.58 15927.57,9325.58 v1(15928.15,9325)
GUI_NRST: C7.2 IC1.25 J20.A5 R5.2 | length 5372.7
  Top Layer 1 w5: C7.2@15883.15,10528.82 15883.15,10573.23 R5.2@15893.74,10583.82 15900.07,10590.15 15920.21,10590.15 15954.78,10624.73 15954.78,10745.45 15970.2,10760.87 IC1.25@16015.39,10760.87 16016.06,10761.53 16074.57,10761.53 v1(16075.24,10762.2)
  Unused w5: v1(16225.01,11246.58) 16249.33,11246.58 16264.2,11261.44 16276.94,11261.44 16294.86,11243.52 16299.81,11243.52 16303.87,11247.58 16318.82,11247.58 16324.18,11242.22 16354.75,11242.22 16368.15,11228.82 16418.59,11228.82 16429.06,11218.34 16532.67,11218.34 16536.91,11222.58 16675.6,11222.58 16791.98,11106.2 16836.98,11106.2 16874.19,11069 16927.26,11069 16963.92,11105.66 16963.92,11130.45 16984.84,11151.37 16984.84,11289.98 17393.85,11698.99 18286.28,11698.99 ; 18483.13,11698.99 18640.37,11856.23 18640.37,12723.51 18785.16,12868.3 v1(18785.16,12923.92)
  Layer 3 w5: v1(16075.24,10762.2) 16035.29,10802.15 ; v1(16225.01,11246.58) 16217.02,11204.34 cw(c16192.09,11209.06) 16177.74,11188.13 16154,11204.46 ; 16033.85,10805.66 ccw(c16038.85,10805.66) 16035.29,10802.15 ; 16033.85,10805.66 ccw(c16038.85,10805.66) 16035.29,10802.15 ; 16033.85,10805.66 ccw(c16038.85,10805.66) 16035.29,10802.15 ; 16033.85,10805.66 ccw(c16038.85,10805.66) 16035.29,10802.15 ; 16033.85,10805.66 ccw(c16038.85,10805.66) 16035.29,10802.15 ; 16033.85,10805.66 ccw(c16038.85,10805.66) 16035.29,10802.15 ; 16033.85,10805.66 ccw(c16038.85,10805.66) 16035.29,10802.15 ; 16033.85,10805.66 ccw(c16038.85,10805.66) 16035.29,10802.15 ; 16033.85,10805.66 ccw(c16038.85,10805.66) 16035.29,10802.15 ; 16033.85,10805.66 ccw(c16038.85,10805.66) 16035.29,10802.15 ; 16033.85,10805.66 ccw(c16038.85,10805.66) 16035.29,10802.15 ; 16033.85,10805.66 ccw(c16038.85,10805.66) 16035.29,10802.15 ; 16033.85,10805.66 ccw(c16038.85,10805.66) 16035.29,10802.15 ; 16033.85,10805.66 ccw(c16038.85,10805.66) 16035.29,10802.15 ; 16033.85,10805.66 ccw(c16038.85,10805.66) 16035.29,10802.15 ; 16033.85,10805.66 ccw(c16038.85,10805.66) 16035.29,10802.15 ; 16033.85,10805.66 16033.83,10978.64 cw(c16079.21,10978.64) 16033.94,10981.78 16038.1,11041.91 ; 16038.1,11041.91 cw(c16093.35,11038.08) 16038.39,11044.84 ; 16038.1,11041.91 cw(c16093.35,11038.08) 16038.39,11044.84 ; 16038.1,11041.91 cw(c16093.35,11038.08) 16038.39,11044.84 ; 16038.1,11041.91 cw(c16093.35,11038.08) 16038.39,11044.84 ; 16038.1,11041.91 cw(c16093.35,11038.08) 16038.39,11044.84 ; 16038.1,11041.91 cw(c16093.35,11038.08) 16038.39,11044.84 ; 16038.1,11041.91 cw(c16093.35,11038.08) 16038.39,11044.84 ; 16038.1,11041.91 cw(c16093.35,11038.08) 16038.39,11044.84 ; 16038.1,11041.91 cw(c16093.35,11038.08) 16038.39,11044.84 ; 16038.1,11041.91 cw(c16093.35,11038.08) 16038.39,11044.84 ; 16038.1,11041.91 cw(c16093.35,11038.08) 16038.39,11044.84 ; 16038.1,11041.91 cw(c16093.35,11038.08) 16038.39,11044.84 ; 16038.1,11041.91 cw(c16093.35,11038.08) 16038.39,11044.84 ; 16038.1,11041.91 cw(c16093.35,11038.08) 16038.39,11044.84 ; 16038.1,11041.91 cw(c16093.35,11038.08) 16038.39,11044.84 ; 16038.1,11041.91 cw(c16093.35,11038.08) 16038.39,11044.84 ; 16038.39,11044.84 16044.13,11091.28 cw(c16089.16,11085.73) 16055.62,11116.29 16133.87,11202.18 ; 16133.87,11202.18 cw(c16145.24,11191.83) 16154,11204.46 ; 16133.87,11202.18 cw(c16145.24,11191.83) 16154,11204.46 ; 16133.87,11202.18 cw(c16145.24,11191.83) 16154,11204.46 ; 16133.87,11202.18 cw(c16145.24,11191.83) 16154,11204.46 ; 16133.87,11202.18 cw(c16145.24,11191.83) 16154,11204.46 ; 16133.87,11202.18 cw(c16145.24,11191.83) 16154,11204.46 ; 16133.87,11202.18 cw(c16145.24,11191.83) 16154,11204.46 ; 16133.87,11202.18 cw(c16145.24,11191.83) 16154,11204.46 ; 16133.87,11202.18 cw(c16145.24,11191.83) 16154,11204.46 ; 16133.87,11202.18 cw(c16145.24,11191.83) 16154,11204.46 ; 16133.87,11202.18 cw(c16145.24,11191.83) 16154,11204.46 ; 16133.87,11202.18 cw(c16145.24,11191.83) 16154,11204.46 ; 16133.87,11202.18 cw(c16145.24,11191.83) 16154,11204.46 ; 16133.87,11202.18 cw(c16145.24,11191.83) 16154,11204.46 ; 16133.87,11202.18 cw(c16145.24,11191.83) 16154,11204.46 ; 16133.87,11202.18 cw(c16145.24,11191.83) 16154,11204.46
  Bottom 6+gnd w5: J20.A5@18778.6,12978.4 18778.6,12941.8 18783.11,12937.29 18783.11,12925.98 v1(18785.16,12923.92)
GUI_SWD.CLK_1: IC1.109 J17.1 J20.A8 | length 3270.8
  Top Layer 1 w5: IC1.109@16782.64,11311.57 16783.27,11312.2 16798.85,11312.2 16818.55,11331.91 v1(16846.8,11331.91) ; v1@17870,11752.72 J17.1@17870,11778.82
  Unused w5: v1(17870.12,11752.6) 17886.42,11768.9 18468.12,11768.9 18600.37,11901.14 18600.37,12740.08 18699.39,12839.1 18699.39,12944.74 18761.98,13007.33 18805.26,13007.33 18819.18,13021.25 18819.18,13033.26 18828.05,13042.13 18861.22,13042.13 v1(18876.59,13026.75)
  Layer 3 w5: v1(16846.8,11331.91) 16862.51,11331.91 17302.62,11772.02 ; 17499.47,11772.02 17850.69,11772.02 v1(17870.12,11752.6)
  Bottom 6+gnd w5: J20.A8@18877.02,12978.4 v1@18877.02,13026.32
GUI_SWD.IO_1: IC1.105 J18.1 J20.A7 | length 3473.8
  Top Layer 1 w5: IC1.105@16860.91,11174.25 16861.02,11174.37 16921.6,11174.37 16929.31,11182.08 16937.5,11182.08 v1(16939.55,11184.13) ; v1@17990,11752.72 J18.1@17990,11778.82
  Unused w5: v1(16828.52,11308.31) 16864.13,11308.31 16939.55,11232.89 v1(16939.55,11184.13) ; v1(17990.12,11752.6) 18465.97,11752.6 18610.37,11897 18610.37,12735.94 18709.39,12834.96 18709.39,12940.6 18766.12,12997.33 18820.63,12997.33 18837.76,13014.47 18837.76,13026.21 v1(18837.22,13026.75)
  Layer 3 w5: v1(16828.52,11308.31) 16828.44,11308.39 16828.44,11335.29 16840.43,11347.28 16863.74,11347.28 17298.48,11782.02 ; 17495.33,11782.02 17961.98,11782.02 17990.12,11753.89 v1(17990.12,11752.6)
  Bottom 6+gnd w5: J20.A7@18837.65,12978.4 v1@18837.65,13026.32
GUI_SWD.SWO_1: IC1.133 J20.A6 | length 3918.2
  Top Layer 1 w5: v1(16310.24,11232.2) IC1.133@16310.2,11311.57
  Unused w5: v1(16310.24,11232.2) 16350.62,11232.2 16365.31,11217.52 16415.74,11217.52 16424.92,11208.34 16537.67,11208.34 16540.45,11211.12 16670.85,11211.12 16787.23,11094.74 16832.23,11094.74 16867.97,11059 16931.4,11059 16973.92,11101.52 16973.92,11124.24 16996.31,11146.62 16996.31,11287.3 17397.99,11688.99 18292.49,11688.99 ; 18489.34,11688.99 18650.37,11850.01 18650.37,12719.37 18818.4,12887.4 v1(18818.4,12928.05)
  Bottom 6+gnd w5: J20.A6@18817.97,12978.4 18818.18,12978.19 18818.18,12928.27 v1(18818.4,12928.05)
I2C1_SCL: IC2.139 IC8.6 R15.1 U5.2 U7.2 | length 4086.1
  Top Layer 1 w5: v1(14463.15,9828.82) 14461.48,9827.15 IC8.6@14461.48,9768.49 14465.24,9764.73 14465.24,9701.51 R15.1@14471.48,9695.26 ; IC2.139@14883.85,11307.38 v1(14883.85,11410.07) ; U7.2@16420,11915 16420,11881.64 v1(16440,11861.64) ; U5.2@16557.4,11915 16557.4,11865.51 16560,11862.91 v1(16560,11860)
  Unused w5: v1(14463.15,9828.82) 14463.15,9928.82 14595.83,10061.5 14595.83,10756.14 14570.65,10781.32 14570.65,11151.32 14603.15,11183.82 14603.15,11243.82 14769.4,11410.07 v1(14883.85,11410.07) 15103.22,11410.07 15149.01,11455.86 15363.16,11455.86 15366.93,11459.64 15483.51,11459.64 15549.33,11393.82 15937.83,11393.82 16044.01,11500 16144.01,11500 16231.51,11587.5 ; 16428.36,11587.5 16428.36,11850 v1(16440,11861.64)
  Layer 3 w5: v1(16440,11861.64) 16521.62,11861.64 16533.63,11849.63 16546.37,11849.63 16556.74,11860 v1(16560,11860)
I2C1_SCL1_9: R149.1 U5.4 | length 284.3
  Top Layer 1 w5: v1(16555,12010) 16590.98,12010 U5.4@16594.8,12013.82
  Layer 3 w5: v1(16410,12100) 16435.58,12100 16437.76,12102.17 16450.49,12102.17 16461.71,12090.96 16461.71,12090.41 16472.92,12079.19 16502.27,12079.19 16555,12026.46 v1(16555,12010)
  Bottom 6+gnd w5: R149.1@16400,12144.72 16400,12110 v1(16410,12100)
I2C1_SCL2_9: R151.1 U7.4 | length 227.9
  Top Layer 1 w5: v1(16430,12050) 16431.48,12048.52 16431.48,12039.74 16441.22,12030 16448.54,12030 16457.4,12021.14 U7.4@16457.4,12013.82
  Layer 3 w5: v1(16334.4,12089.55) 16373.95,12050 v1(16430,12050)
  Bottom 6+gnd w5: R151.1@16315,12144.72 16315,12110 16334.4,12090.6 v1(16334.4,12089.55) v1@16335,12088.95
I2C1_SCL_6: IC1.139 IC7.6 R13.1 | length 3306
  Top Layer 1 w5: v1(15936.32,9936.49) 15967.09,9946.7 ; v1(16192.09,11209.05) IC1.139@16192.09,11311.57 ; v1(16985.24,9927.2) 16939.07,9939.52 ; v1(16985.28,9815.69) 16985.28,9770.48 IC7.6@16985.24,9770.43 16985.24,9727.64 17013.27,9699.61 R13.1@17015.24,9699.61 ; 15967.09,9946.7 cw(c15970.24,9937.2) 15970.24,9947.2 ; 15967.09,9946.7 cw(c15970.24,9937.2) 15970.24,9947.2 ; 15967.09,9946.7 cw(c15970.24,9937.2) 15970.24,9947.2 ; 15967.09,9946.7 cw(c15970.24,9937.2) 15970.24,9947.2 ; 15967.09,9946.7 cw(c15970.24,9937.2) 15970.24,9947.2 ; 15967.09,9946.7 cw(c15970.24,9937.2) 15970.24,9947.2 ; 15967.09,9946.7 cw(c15970.24,9937.2) 15970.24,9947.2 ; 15967.09,9946.7 cw(c15970.24,9937.2) 15970.24,9947.2 ; 15967.09,9946.7 cw(c15970.24,9937.2) 15970.24,9947.2 ; 15967.09,9946.7 cw(c15970.24,9937.2) 15970.24,9947.2 ; 15967.09,9946.7 cw(c15970.24,9937.2) 15970.24,9947.2 ; 15967.09,9946.7 cw(c15970.24,9937.2) 15970.24,9947.2 ; 15967.09,9946.7 cw(c15970.24,9937.2) 15970.24,9947.2 ; 15967.09,9946.7 cw(c15970.24,9937.2) 15970.24,9947.2 ; 15967.09,9946.7 cw(c15970.24,9937.2) 15970.24,9947.2 ; 15967.09,9946.7 cw(c15970.24,9937.2) 15970.24,9947.2 ; 15970.24,9947.2 16897.96,9947.2 ; 16897.96,9947.2 cw(c16897.96,9937.2) 16899.83,9947.03 ; 16897.96,9947.2 cw(c16897.96,9937.2) 16899.83,9947.03 ; 16897.96,9947.2 cw(c16897.96,9937.2) 16899.83,9947.03 ; 16897.96,9947.2 cw(c16897.96,9937.2) 16899.83,9947.03 ; 16897.96,9947.2 cw(c16897.96,9937.2) 16899.83,9947.03 ; 16897.96,9947.2 cw(c16897.96,9937.2) 16899.83,9947.03 ; 16897.96,9947.2 cw(c16897.96,9937.2) 16899.83,9947.03 ; 16897.96,9947.2 cw(c16897.96,9937.2) 16899.83,9947.03 ; 16897.96,9947.2 cw(c16897.96,9937.2) 16899.83,9947.03 ; 16897.96,9947.2 cw(c16897.96,9937.2) 16899.83,9947.03 ; 16897.96,9947.2 cw(c16897.96,9937.2) 16899.83,9947.03 ; 16897.96,9947.2 cw(c16897.96,9937.2) 16899.83,9947.03 ; 16897.96,9947.2 cw(c16897.96,9937.2) 16899.83,9947.03 ; 16897.96,9947.2 cw(c16897.96,9937.2) 16899.83,9947.03 ; 16897.96,9947.2 cw(c16897.96,9937.2) 16899.83,9947.03 ; 16897.96,9947.2 cw(c16897.96,9937.2) 16899.83,9947.03 ; 16899.83,9947.03 16937.98,9939.77 ; 16937.98,9939.77 cw(c16935.11,9924.67) 16939.07,9939.52 ; 16937.98,9939.77 cw(c16935.11,9924.67) 16939.07,9939.52 ; 16937.98,9939.77 cw(c16935.11,9924.67) 16939.07,9939.52 ; 16937.98,9939.77 cw(c16935.11,9924.67) 16939.07,9939.52 ; 16937.98,9939.77 cw(c16935.11,9924.67) 16939.07,9939.52 ; 16937.98,9939.77 cw(c16935.11,9924.67) 16939.07,9939.52 ; 16937.98,9939.77 cw(c16935.11,9924.67) 16939.07,9939.52 ; 16937.98,9939.77 cw(c16935.11,9924.67) 16939.07,9939.52 ; 16937.98,9939.77 cw(c16935.11,9924.67) 16939.07,9939.52 ; 16937.98,9939.77 cw(c16935.11,9924.67) 16939.07,9939.52 ; 16937.98,9939.77 cw(c16935.11,9924.67) 16939.07,9939.52 ; 16937.98,9939.77 cw(c16935.11,9924.67) 16939.07,9939.52 ; 16937.98,9939.77 cw(c16935.11,9924.67) 16939.07,9939.52 ; 16937.98,9939.77 cw(c16935.11,9924.67) 16939.07,9939.52 ; 16937.98,9939.77 cw(c16935.11,9924.67) 16939.07,9939.52 ; 16937.98,9939.77 cw(c16935.11,9924.67) 16939.07,9939.52
  Layer 3 w5: v1(15936.32,9936.49) 15936.32,10479.8 15993.83,10537.31 15993.83,11170.85 ; v1(16192.09,11209.05) 16162.25,11244.93 ccw(c16150.43,11235.1) 16151.76,11250.41 16103.59,11254.6 ; v1(16985.28,9815.69) v1@16985.26,9927.18 ; 15993.83,11170.85 cw(c15998.83,11170.85) 15995.28,11174.37 15998.26,11177.35 cw(c16008.83,11166.71) 15999.33,11178.32 16085.28,11248.93 ; 15993.83,11170.85 cw(c15998.83,11170.85) 15995.27,11174.36 ; 15993.83,11170.85 cw(c15998.83,11170.85) 15995.27,11174.36 ; 15993.83,11170.85 cw(c15998.83,11170.85) 15995.27,11174.36 ; 15993.83,11170.85 cw(c15998.83,11170.85) 15995.27,11174.36 ; 16085.28,11248.93 cw(c16101.39,11229.33) 16103.59,11254.61 ; 16085.28,11248.93 cw(c16101.39,11229.33) 16103.59,11254.61 ; 16085.28,11248.93 cw(c16101.39,11229.33) 16103.59,11254.61 ; 16085.28,11248.93 cw(c16101.39,11229.33) 16103.59,11254.61 ; 16085.28,11248.93 cw(c16101.39,11229.33) 16103.59,11254.61 ; 16085.28,11248.93 cw(c16101.39,11229.33) 16103.59,11254.61 ; 16085.28,11248.93 cw(c16101.39,11229.33) 16103.59,11254.61 ; 16085.28,11248.93 cw(c16101.39,11229.33) 16103.59,11254.61 ; 16085.28,11248.93 cw(c16101.39,11229.33) 16103.59,11254.61 ; 16085.28,11248.93 cw(c16101.39,11229.33) 16103.59,11254.61 ; 16085.28,11248.93 cw(c16101.39,11229.33) 16103.59,11254.61 ; 16085.28,11248.93 cw(c16101.39,11229.33) 16103.59,11254.61 ; 16085.28,11248.93 cw(c16101.39,11229.33) 16103.59,11254.61 ; 16085.28,11248.93 cw(c16101.39,11229.33) 16103.59,11254.61 ; 16085.28,11248.93 cw(c16101.39,11229.33) 16103.59,11254.61 ; 16085.28,11248.93 cw(c16101.39,11229.33) 16103.59,11254.61
I2C1_SDA: IC2.140 IC8.5 R16.1 R150.1 | length 4200.7
  Top Layer 1 w5: R16.1@14406.48,9695.26 14406.48,9763.49 IC8.5@14411.48,9768.49 14411.48,9827.15 v1(14413.15,9828.82) ; IC2.140@14864.16,11307.38 14864.16,11419.83 14879.76,11435.43 v1(14888.29,11435.43)
  Unused w5: v1(14413.15,9828.82) 14453.15,9868.82 14453.15,9943.82 14578.15,10068.82 14578.15,10748.82 14558.15,10768.82 14558.15,11158.82 14588.15,11188.82 14588.15,11217.08 14588.52,11217.45 14588.52,11230.19 14588.15,11230.56 14588.15,11253.82 14756.68,11422.35 cw(c14760.2,11418.8) 14757.25,11422.83 14764.51,11428.15 14771.79,11435.43 v1(14888.29,11435.43) 15114.44,11435.43 15144.87,11465.86 15359.01,11465.86 15363.15,11470 15487.8,11470 15553.99,11403.82 15933.68,11403.82 16040.23,11510.36 16140.23,11510.36 16221.51,11591.64 ; v1(16355,12105) 16355,12085 16418.36,12021.64 16418.36,11591.64
  Bottom 6+gnd w5: v1(16355,12105) R150.1@16355,12144.72
I2C1_SDA_6: IC1.140 IC7.5 R14.1 | length 3074
  Top Layer 1 w5: v1(15935.24,9902.2) 16020.97,9926.97 ; v1(16172,11260.7) 16172.2,11260.9 16172.2,11311.38 IC1.140@16172.4,11311.57 ; v1(16935.11,9924.67) 16846.41,9932.66 ; v1(16935.63,9815.65) 16935.63,9770.83 IC7.5@16935.24,9770.43 16935.24,9712.62 16949.47,9698.38 R14.1@16950.24,9698.38 ; 16020.97,9926.97 cw(c16025.24,9912.2) 16025.13,9927.58 ; 16020.97,9926.97 cw(c16025.24,9912.2) 16025.13,9927.58 ; 16020.97,9926.97 cw(c16025.24,9912.2) 16025.13,9927.58 ; 16020.97,9926.97 cw(c16025.24,9912.2) 16025.13,9927.58 ; 16020.97,9926.97 cw(c16025.24,9912.2) 16025.13,9927.58 ; 16020.97,9926.97 cw(c16025.24,9912.2) 16025.13,9927.58 ; 16020.97,9926.97 cw(c16025.24,9912.2) 16025.13,9927.58 ; 16020.97,9926.97 cw(c16025.24,9912.2) 16025.13,9927.58 ; 16020.97,9926.97 cw(c16025.24,9912.2) 16025.13,9927.58 ; 16020.97,9926.97 cw(c16025.24,9912.2) 16025.13,9927.58 ; 16020.97,9926.97 cw(c16025.24,9912.2) 16025.13,9927.58 ; 16020.97,9926.97 cw(c16025.24,9912.2) 16025.13,9927.58 ; 16020.97,9926.97 cw(c16025.24,9912.2) 16025.13,9927.58 ; 16020.97,9926.97 cw(c16025.24,9912.2) 16025.13,9927.58 ; 16020.97,9926.97 cw(c16025.24,9912.2) 16025.13,9927.58 ; 16020.97,9926.97 cw(c16025.24,9912.2) 16025.13,9927.58 ; 16025.13,9927.58 16837.2,9933.05 ; 16837.2,9933.05 cw(c16837.84,9837.68) 16846.41,9932.67 ; 16837.2,9933.05 cw(c16837.84,9837.68) 16846.41,9932.67 ; 16837.2,9933.05 cw(c16837.84,9837.68) 16846.41,9932.67 ; 16837.2,9933.05 cw(c16837.84,9837.68) 16846.41,9932.67 ; 16837.2,9933.05 cw(c16837.84,9837.68) 16846.41,9932.67 ; 16837.2,9933.05 cw(c16837.84,9837.68) 16846.41,9932.67 ; 16837.2,9933.05 cw(c16837.84,9837.68) 16846.41,9932.67 ; 16837.2,9933.05 cw(c16837.84,9837.68) 16846.41,9932.67 ; 16837.2,9933.05 cw(c16837.84,9837.68) 16846.41,9932.67 ; 16837.2,9933.05 cw(c16837.84,9837.68) 16846.41,9932.67 ; 16837.2,9933.05 cw(c16837.84,9837.68) 16846.41,9932.67 ; 16837.2,9933.05 cw(c16837.84,9837.68) 16846.41,9932.67 ; 16837.2,9933.05 cw(c16837.84,9837.68) 16846.41,9932.67 ; 16837.2,9933.05 cw(c16837.84,9837.68) 16846.41,9932.67 ; 16837.2,9933.05 cw(c16837.84,9837.68) 16846.41,9932.67 ; 16837.2,9933.05 cw(c16837.84,9837.68) 16846.41,9932.67
  Layer 3 w5: v1(15935.24,9902.2) 15920.95,9916.49 15920.95,10507.91 15983.83,10570.8 15983.83,11175 ; v1(16172,11260.7) 16103.42,11264.64 ccw(c16101.39,11229.33) 16078.94,11256.67 15992.96,11186.03 ccw(c16008.83,11166.71) 15991.21,11184.44 15985.28,11178.51 ; v1(16935.11,9924.67) 16935.37,9924.41 16935.37,9815.91 v1(16935.63,9815.65) ; 15983.83,11175 cw(c15988.83,11175) 15985.28,11178.51 ; 15983.83,11175 cw(c15988.83,11175) 15985.28,11178.51 ; 15983.83,11175 cw(c15988.83,11175) 15985.28,11178.51 ; 15983.83,11175 cw(c15988.83,11175) 15985.28,11178.51 ; 15983.83,11175 cw(c15988.83,11175) 15985.28,11178.51 ; 15983.83,11175 cw(c15988.83,11175) 15985.28,11178.51 ; 15983.83,11175 cw(c15988.83,11175) 15985.28,11178.51 ; 15983.83,11175 cw(c15988.83,11175) 15985.28,11178.51 ; 15983.83,11175 cw(c15988.83,11175) 15985.28,11178.51 ; 15983.83,11175 cw(c15988.83,11175) 15985.28,11178.51 ; 15983.83,11175 cw(c15988.83,11175) 15985.28,11178.51 ; 15983.83,11175 cw(c15988.83,11175) 15985.28,11178.51 ; 15983.83,11175 cw(c15988.83,11175) 15985.28,11178.51 ; 15983.83,11175 cw(c15988.83,11175) 15985.28,11178.51 ; 15983.83,11175 cw(c15988.83,11175) 15985.28,11178.51 ; 15983.83,11175 cw(c15988.83,11175) 15985.28,11178.51
I2C2_SCL: IC1.69 J7.2 | length 2984.4
  Top Layer 1 w5: v1(16698.15,10528.82) 16723.58,10503.38 IC1.69@16723.58,10466.06
  Top Layer 1 w10: J7.2@16098.03,8662.6 v1@16098.03,8694.34
  Unused w5: v1(16097.8,8694.57) 16040.59,8709.56 ccw(c16036.7,8694.69) 16028.11,8707.44 15990.15,8681.93 cw(c15981.58,8694.69) 15971.5,8706.3 16027.97,8755.31 ccw(c16018.15,8766.65) 16028.76,8756.04 16031.68,8758.97 ccw(c16028.15,8762.5) 16033.15,8762.5 16033.15,9292.25 15763.15,9562.25 15763.15,10192.53 15864.44,10293.82 15915.18,10293.82 16062.29,10440.93 16062.5,10440.93 16098.75,10477.17 16672.01,10477.17 16698.15,10503.31 v1(16698.15,10528.82)
I2C2_SDA: IC1.70 J9.2 | length 2998.9
  Top Layer 1 w5: v1(16708.15,10553.82) 16710.19,10553.82 16743.27,10520.74 IC1.70@16743.27,10466.06
  Top Layer 1 w10: J9.2@16036.93,8662.72 v1@16036.93,8694.46
  Unused w5: v1(16036.7,8694.69) 15993.26,8672.16 cw(c15981.58,8694.69) 15964.95,8713.85 16021.43,8762.87 ccw(c16018.15,8766.65) 16023.15,8766.65 16023.15,9288.11 15753.15,9558.11 15753.15,10196.67 15860.29,10303.82 15911.04,10303.82 16058.15,10450.93 16058.36,10450.93 16094.61,10487.17 16664.05,10487.17 16682.78,10505.9 16682.78,10535.19 16691.78,10544.19 16698.52,10544.19 v1(16708.15,10553.82)
I2S3_CK: IC2.111 R155.1 | length 1285.2
  Top Layer 1 w5: IC2.111@15435.03,11307.38 15435.03,11435.49 v1(15436.4,11436.87)
  Layer 3 w5: v1(15436.4,11436.87) 15467.59,11468.06 15473.28,11468.06 15502.98,11497.75 ; 15699.83,11497.75 15699.83,12040.21 15776.16,12116.54 16063.46,12116.54 16086.6,12093.4 16124.55,12093.4 v1(16139.66,12108.51)
  Bottom 6+gnd w5: v1@16140,12111.13 R155.1@16140,12144.72
I2S3_MCK: IC2.97 R156.1 | length 1529.4
  Top Layer 1 w5: IC2.97@15552.67,11012.58 15553.37,11011.88 15586.27,11011.88 15602.28,10995.87 15602.28,10981.66 v1(15602.13,10981.51)
  Layer 2 w5: v1(15930,12009.63) 16074.63,12009.63 16095.76,12030.76 v1(16095.76,12110.37)
  Layer 3 w5: v1(15602.13,10981.51) 15667.4,10981.51 cw(c15667.4,10976.51) 15670.06,10980.74 ccw(c15678.15,10993.82) 15686.27,10980.76 cw(c15688.9,10976.51) 15688.9,10981.51 15734.66,10981.51 15743.15,10990 ; v1(15930,12009.63) 15930.37,12009.63 15940,12000 15940,10990
  Bottom 6+gnd w5: R156.1@16095,12144.72 16095,12111.13 v1(16095.76,12110.37)
I2S3_SDI: IC2.112 R152.1 | length 1486.9
  Top Layer 1 w5: IC2.112@15415.34,11307.38 15415.34,11407.01 15417.61,11409.27 v1(15417.61,11412.18)
  Layer 3 w5: v1(15417.61,11412.18) 15417.61,11409.27 15421.38,11405.5 15421.38,11379.67 15424.31,11376.74 15444.89,11376.74 15453.15,11385 15453.15,11390.3 15533.15,11470.3 ; 15730,11470.3 15730,12027.95 15788.58,12086.54 16050.18,12086.54 16076.72,12060 16145.52,12060 16158.65,12073.13 16184.02,12073.13 16205.51,12094.63 16236.37,12094.63 16251.74,12110 v1(16275,12110)
  Bottom 6+gnd w5: v1@16275,12109.16 R152.1@16275,12142.76
I2S3_SDO: IC2.113 R153.1 | length 1447.1
  Top Layer 1 w5: IC2.113@15395.66,11307.38 15395.66,11426.99 15398.26,11429.6 v1(15398.26,11432.51)
  Layer 3 w5: v1(15398.26,11432.51) 15419.03,11432.51 15446.91,11404.62 15453.33,11404.62 15523.15,11474.44 ; 15720,11474.44 15720,12032.09 15777.91,12090 15784.44,12096.54 16054.32,12096.54 16060.86,12090 16080.86,12070 16141.38,12070 16154.51,12083.13 16179.88,12083.13 16206.74,12110 v1(16230,12110)
  Bottom 6+gnd w5: v1@16230,12109.16 R153.1@16230,12142.76
I2S3_WS: IC2.110 R154.1 | length 1314.9
  Top Layer 1 w5: IC2.110@15454.71,11307.38 15454.71,11425.01 15468.52,11438.82 v1(15468.52,11441.56)
  Layer 3 w5: v1(15468.52,11441.56) 15512.98,11486.01 ; 15709.83,11486.01 15709.83,12036.07 15780.3,12106.54 16058.46,12106.54 16084.32,12080.68 16135.68,12080.68 16146.03,12091.03 16146.03,12093.13 16162.89,12110 v1(16185,12110)
  Bottom 6+gnd w5: v1@16185,12111.13 R154.1@16185,12144.72
I2S_CKIN: IC2.99 R148.1 | length 3903.4
  Top Layer 1 w5: v1(15496.1,11053.05) 15497.2,11051.95 IC2.99@15552.67,11051.95
  Unused w5: v1(15496.1,11053.05) 15458.15,11015.1 15458.15,10708.82 15373.15,10623.82 14878.15,10623.82 14863.15,10638.82 14863.15,11258.07 14979.65,11374.57 15029.25,11374.57 15037.18,11366.64 15045.47,11366.64 15046.02,11367.19 15108.62,11367.19 15166.43,11425 15308.15,11425 15369.33,11363.82 15950.25,11363.82 16056.43,11470 16156.43,11470 16318.15,11631.72 ; v1(16444.12,12086.8) 16447.03,12086.8 16451.84,12081.99 16470.13,12081.99 16476.74,12075.37 16491.37,12075.37 16515,12051.74 16515,11631.72
  Bottom 6+gnd w5: v1(16444.12,12086.8) 16444.12,12143.85 R148.1@16445,12144.72
LATCH: IC14.18 IC15.1 IC16.1 IC17.1 | length 3329.6
  Top Layer 1 w8: 18656.14,9736.81 18656.14,10161.81 ; 18852.99,10161.81 19045,10353.82 19045,10683.82 19143.98,10782.79 IC14.18@19195.67,10782.79 19393.98,10782.79 19480,10868.82 19935,10868.82 20080,11013.82 v1(20300,11013.82) IC15.1@20300,10959.25 ; IC17.1@20300,10211.53 v1(20300,10266.1) ; IC16.1@20300,10591.53 v1(20300,10646.1)
  Layer 3 w8: v1(20300,10266.1) v1(20300,11013.82)
LCD_RESET: H3.41 IC1.96 R46.1 | length 5534.4
  Top Layer 1 w5: v1(15849.86,10112.2) 16016.16,10048.51 ccw(c16025.24,10072.2) 16025.24,10046.83 16690.24,10046.83 ccw(c16690.24,10072.2) 16691.52,10046.86 16842.71,10054.68 ccw(c16841.4,10080.02) 16853.86,10057.92 16875.62,10070.19 v1(16888.98,10082.13) ; v1(16713.15,11018.82) 16734.88,10997.09 IC1.96@16860.91,10997.09 ; v1(17828.57,11286.98) 17863.57,11251.98 R46.1@17908.57,11251.98
  Unused w5: v1(16913.4,10223.87) 17645.27,10461.81 cw(c17710.04,10262.58) 17645.42,10461.86 17859.75,10531.36 ccw(c17855.01,10545.99) 17867.82,10554.49 17828.76,10613.35 ccw(c17824.59,10610.58) 17828.15,10614.09 17819.64,10622.6 17819.64,10625.57 ccw(c17814.64,10625.57) 17818.81,10628.34 17810.91,10640.24 cw(c17823.72,10648.74) 17808.35,10649.23 v1(17828.57,11286.98)
  Layer 3 w5: v1(15849.86,10112.2) 15850.24,10112.58 15850.24,10481.35 15834.82,10496.76 15834.82,10521.79 15890.24,10577.2 15890.24,10995.18 15889.31,10996.1 15889.31,10996.39 15889.31,10997.98 15888.39,10999.28 15877.33,11014.87 cw(c15889.86,11023.77) 15874.49,11023.77 15874.49,11052.2 cw(c15889.86,11052.2) 15875.29,11057.11 15952.21,11286.6 cw(c15995.24,11272.2) 15963.09,11304.22 15966.96,11308.1 cw(c15991.64,11283.28) 15991.64,11318.28 16568.3,11318.28 16707.74,11178.84 16707.74,11041.1 16713.15,11035.69 v1(16713.15,11018.82) ; v1(16888.98,10082.13) 16913.15,10106.29 16913.15,10223.62 v1(16913.4,10223.87)
  Bottom 6+gnd w5: H3.41@17753.15,11258.46 17801.83,11261.87 17808.28,11265.87 ccw(c17804.33,11272.25) 17809.78,11267.1 v1(17828.57,11286.98)
LCD_TE: IC1.48 R137.2 | length 2186.7
  Top Layer 1 w5: v1(16298.15,10343.82) 16310.2,10355.87 IC1.48@16310.2,10466.06
  Unused w5: v1(16298.15,10343.82) 16299.29,10317.95 16283.62,10302.28 16283.62,10293.98 16283.62,10285.69 16289.49,10279.82 16326.55,10242.76 16327.38,10241.92 16328.5,10241.55 16482.31,10190.28 ; 16482.33,10190.27 ccw(c16483.89,10195.02) 16484.02,10190.02 16818.46,10199.58 ccw(c16818.14,10210.64) 16825.93,10202.78 16863.15,10240 v1(17553.15,10470)
  Bottom 6+gnd w5: v1(17553.15,10470) 17553.15,10350 17603.15,10300 17793.15,10300 17948.43,10455.28 R137.2@17948.43,10500